# Allegro board FanEmu.brd
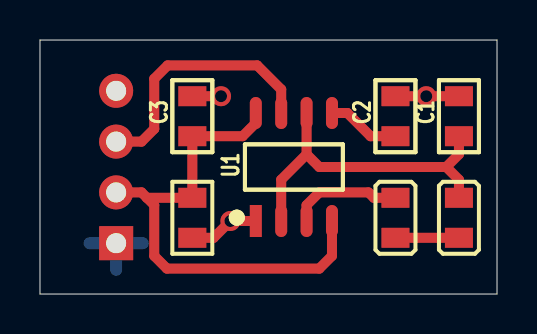
[diagram p0: board, top side]
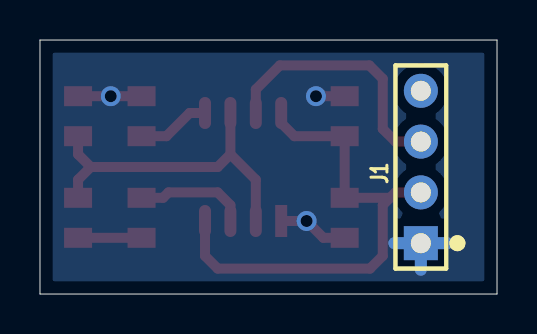
[diagram p1: board, bottom side, seen from below]

Outline 22.86 x 12.7 mm; copper layers: TOP, BOTTOM. Coordinates in mm from the lower left corner of the outline.
Outline path: 0,12.7 0,0 22.86,0 22.86,12.7 0,12.7

## Placement (name value [footprint] x y rotation side)
C1  0.1uF  [CAPC2012X130N]  20.95 8.89 90 top
C2  0.1uF  [CAPC2012X130N]  17.78 8.89 90 top
C3  0.1uF  [CAPC2012X130N]  7.62 8.89 90 top
C4  1uF  [CAPC2012X130N]  7.62 3.81 270 top
J1  PBS-4  [PLS-4]  3.81 2.54 90 bottom
R1  20.0k  [RESC2013X50N]  17.78 3.81 270 top
R2  5.1k  [RESC2013X50N]  20.95 3.81 270 top
U1  LMC555CM  [SOIC127P600X175-8N]  12.7 6.35 90 top

## Library data of the parts
C1-C4 = CAPACITOR: alternate symbols: (CAPC2012X130N_Ass_Silk)
J1 = CONN4_3
R1 R2 = RESISTOR: alternate symbols: (RESC2013X50N_Ass_Silk)
U1 = LMC555C_N_M_1

## Footprints (pads in the part's own frame, mm; a bottom-side part is the same pattern mirrored in y, then rotated)
CAPC2012X130N
  rect 1x1.4 smd: 1(-1,0) 2(1,0)
PLS-4
  rect 1.7x1.7 hole 1: 1(0,0)
  round 1.7 hole 1: 2(2.54,0) 3(5.08,0) 4(7.62,0)
RESC2013X50N
  rect 1x1.4 smd: 1(-1,0) 2(1,0)
SOIC127P600X175-8N
  rect 1.6x0.6 smd: 1(-2.7,1.905)
  oval 1.6x0.6 smd: 2(-2.7,0.635) 3(-2.7,-0.635) 4(-2.7,-1.905) 5(2.7,-1.905) 6(2.7,-0.635) 7(2.7,0.635) 8(2.7,1.905)

## Nets
GND: C1.2 C2.2 C3.2 C4.2 J1.1(GND      / BLACK) U1.1(GND)
VCC: C3.1 C4.1 J1.2(+12V     / *YELLOW) U1.4(RES) U1.8(VCC)
N00233: C2.1 U1.5(COUNT)
N00307: C1.1 R2.1 U1.2(TRIG) U1.6(THRES)
N00405: R1.1 U1.3(OUT)
N00409: R1.2 R2.2
N00863: J1.3(SIGNAL / *GREEN) U1.7(DISCH)

Pads without a net: J1 4

## Via types
v1: diameter 1, hole 0.6, TOP to BOTTOM, 3 vias

## Routing (per net, layer and track width the routed paths; a pad name or vN(x,y) marks a point on that pad's centre or on a via; arc(x,y) is an arc through that point)
GND: length 12.1
  TOP w0.5: C4.2 8.68,2.81 v1(9.52,3.65) U1.1 ; C1.2 v1(19.32,9.89) C2.2 ; C3.2 v1(9.06,9.89)
  BOTTOM w0.6: J1.1 5.14,2.54 ; J1.1 2.48,2.54 ; J1.1 3.81,1.21
VCC: length 25.2
  TOP w0.5: U1.4 14.6,1.91 13.97,1.27 6.35,1.27 5.71,1.91 5.71,4.45 5.35,4.81 ; 5.35,4.81 5.08,5.08 J1.2 ; 5.35,4.81 C4.1 C3.1 10.13,7.89 10.79,8.55 U1.8
N00233: length 3.7
  TOP w0.5: C2.1 16.53,7.89 15.37,9.05 U1.5
N00307: length 16.8
  TOP w0.5: R2.1 20.95,5.71 20.32,6.35 ; 20.32,6.35 20.95,6.98 C1.1 ; 20.32,6.35 13.97,6.35 13.33,6.98 ; 13.33,6.98 12.06,5.71 12.06,3.65 ; 13.33,6.98 U1.6
N00405: length 5.6
  TOP w0.5: U1.3 13.33,4.45 13.97,5.08 16.43,5.08 16.7,4.81 R1.1
N00409: length 3.2
  TOP w0.5: R1.2 R2.2
N00863: length 13
  TOP w0.5: 12.06,9.05 12.06,10.23 10.86,11.43 6.38,11.43 5.71,10.76 5.71,8.26 5.08,7.62 J1.3

## Copper pours and planes (outline as drawn; the poured copper is in the pictures)
GND on BOTTOM: 0.63,0.63 0.63,12.06 22.22,12.06 22.22,0.63
